# Altium PCB PCB_Test.PcbDoc
Units mm, origin at the board's own origin, x right, y up, seen from the top; angles counter-clockwise.
Board outline 152.4 x 101.6 mm, 2 copper layers (Top Layer, Bottom Layer); 14 components, 8 nets, 34 pads, 0 vias.
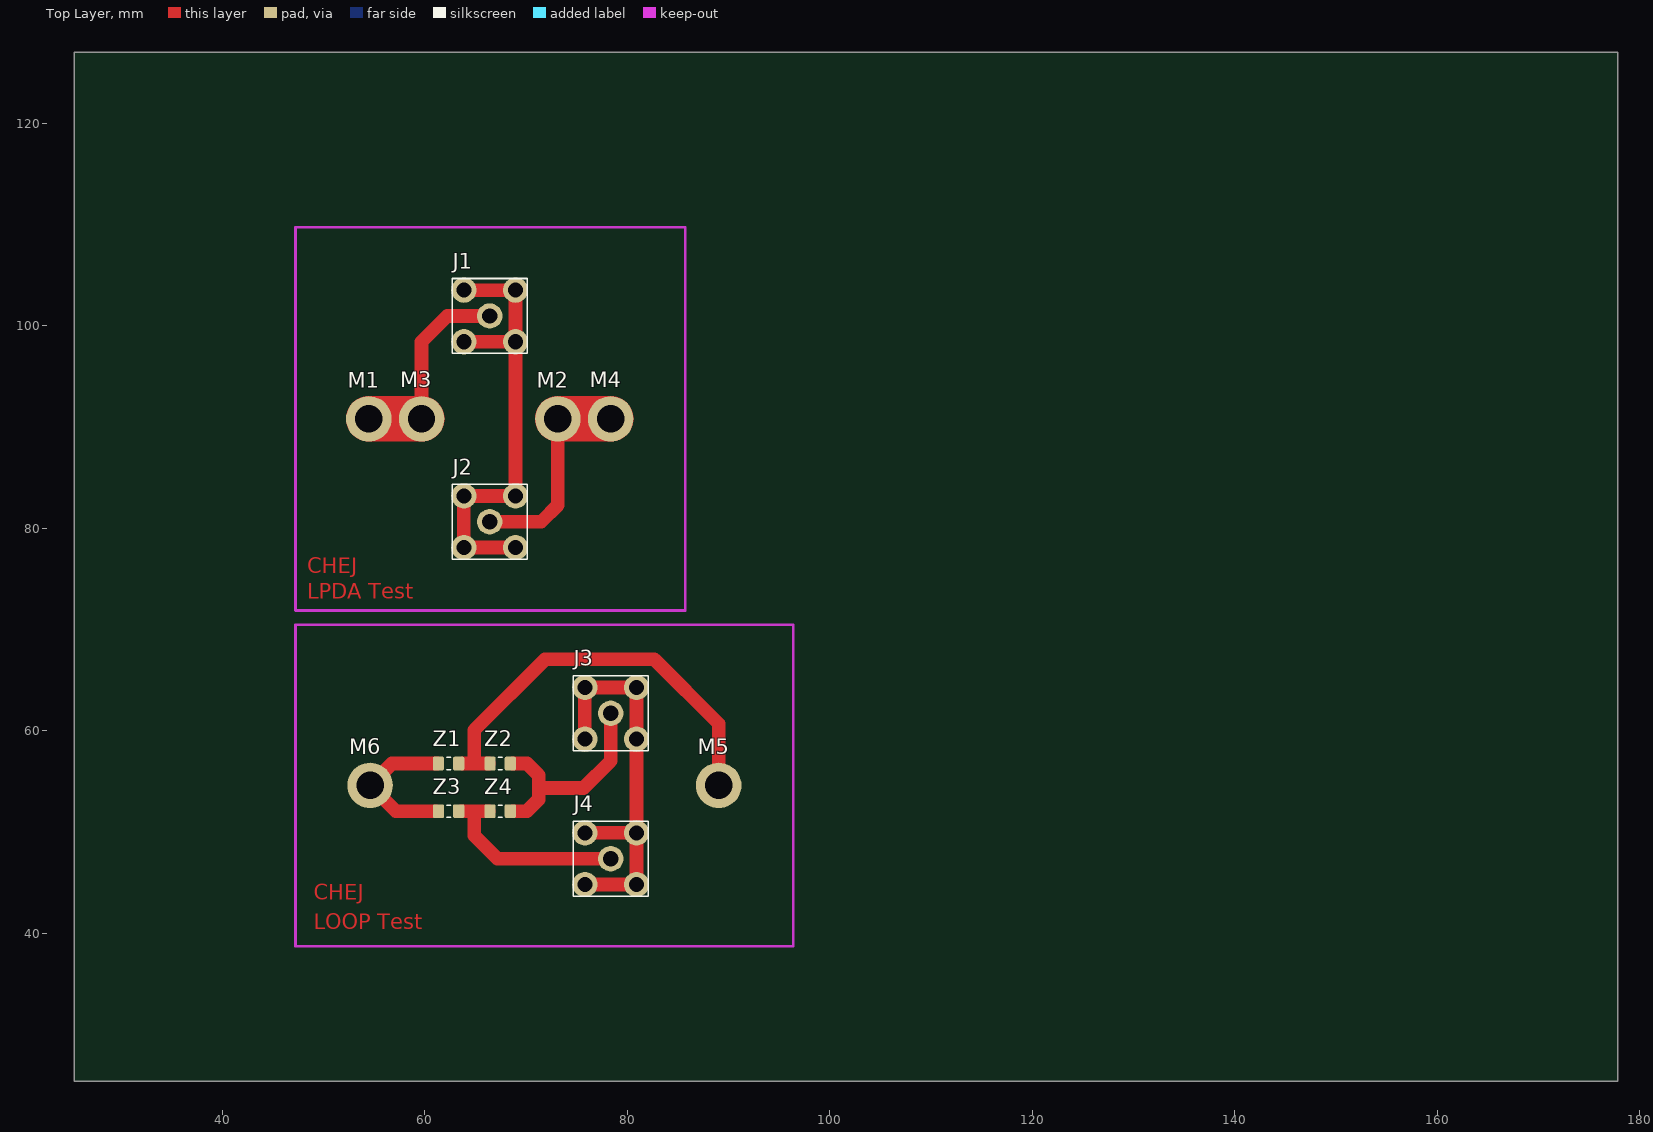
[diagram p0: Top Layer view]
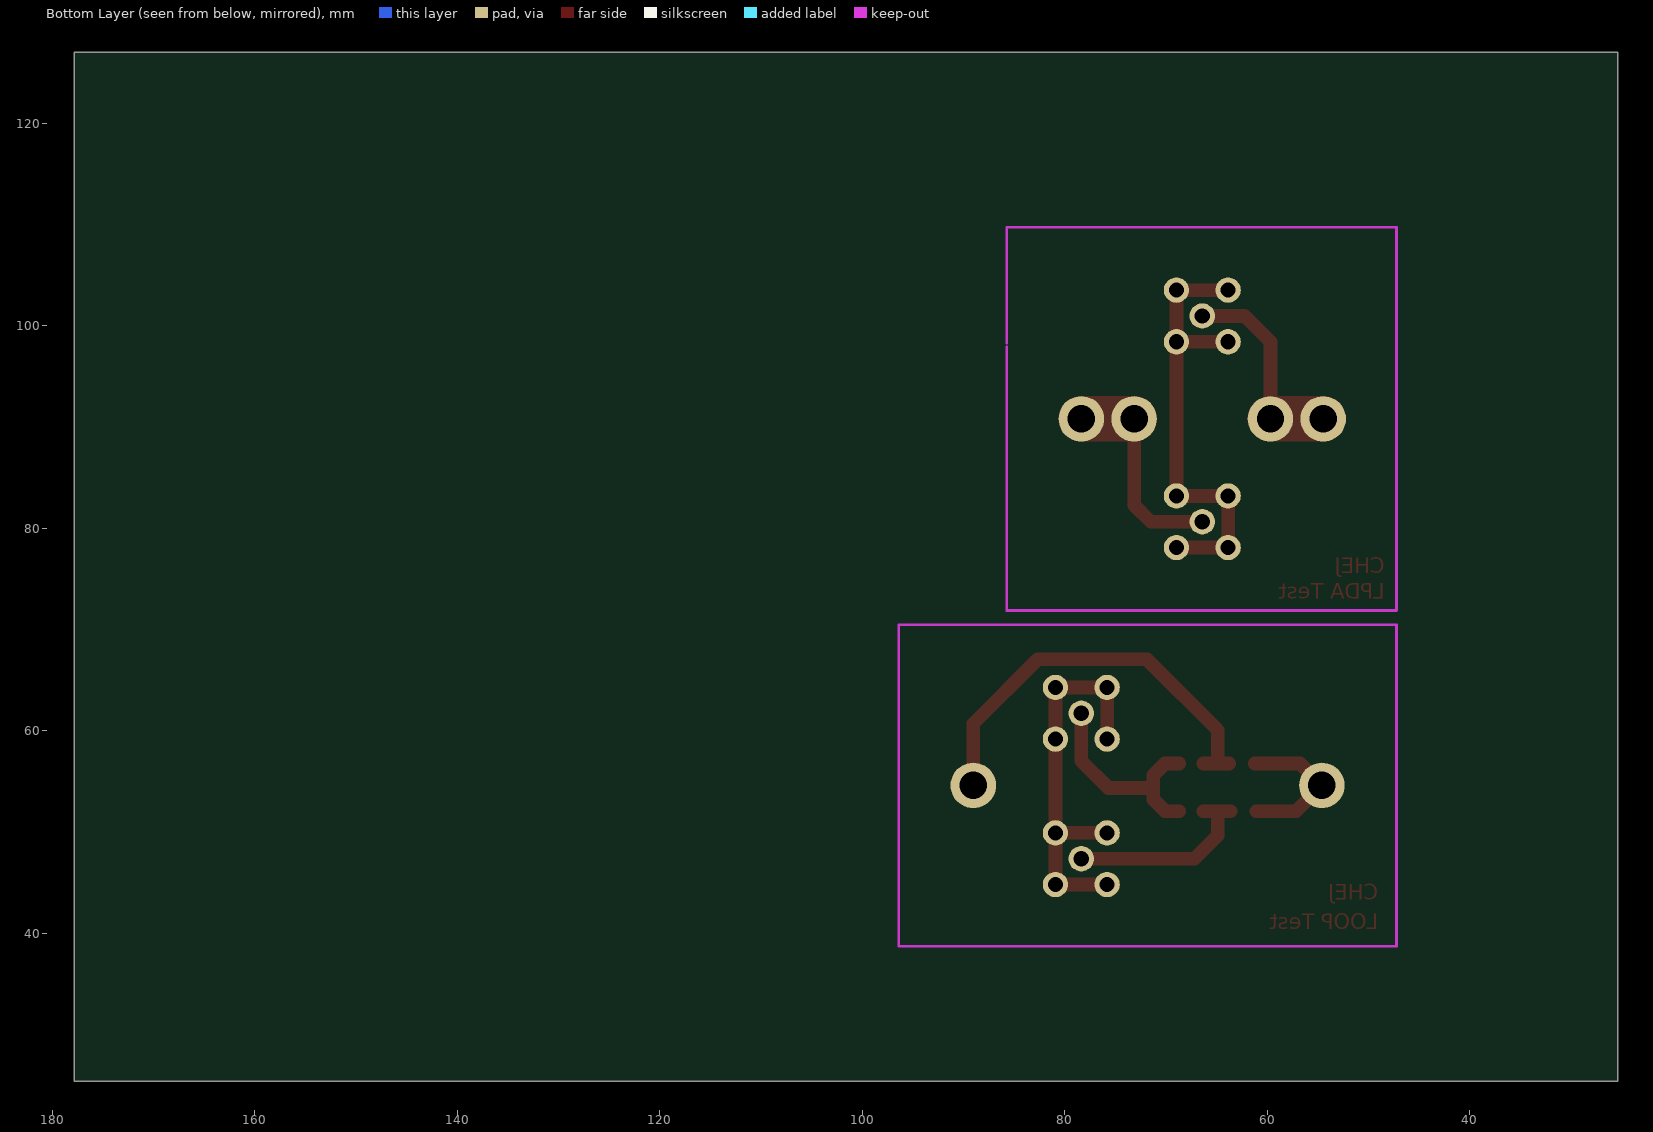
[diagram p1: Bottom Layer view, seen from below]
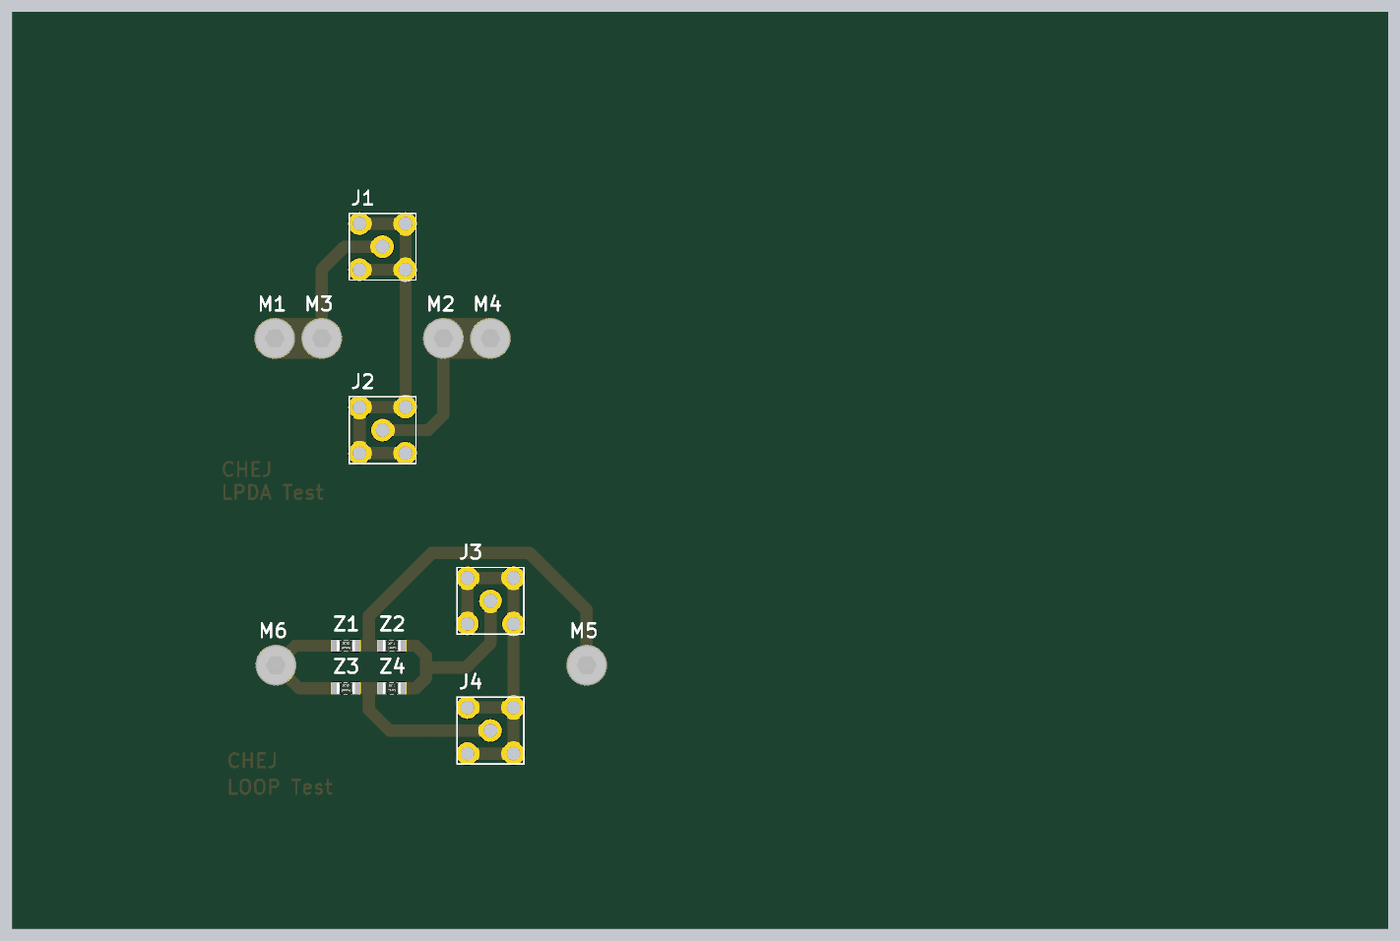
[diagram p2: 3D render of the assembled board from above, using the file's embedded part models]

## Layer stack, top to bottom
Top Solder: solder mask 0.0102, Solder Resist, Dk 3.5
Top Layer: signal copper 0.0356
Dielectric 1: dielectric 0.32, FR-4, Dk 4.8
Bottom Layer: signal copper 0.0356
Bottom Solder: solder mask 0.0102, Solder Resist, Dk 3.5

## Board outline
25.4,25.4 177.8,25.4 177.8,127 25.4,127

## Design rules (kind name [scope] priority, off if disabled: settings)
Clearance [All] p1: gap=0.254 ignorepadtopadclearanceinfootprint=FALSE except(0: Arc-Hole Track-Hole SMDPad-Hole THPad-Hole Via-Hole Fill-Hole Poly-Hole Region-Hole Text-Hole)
PolygonConnect [All] p1: connectstyle=Relief reliefconductorwidth=0.254 reliefentries=4 polygonreliefangle="90 Angle" airgapwidth=0.254
RoutingVias [All] p1: holewidth=0.711 width=1.27 viastyle="Through Hole" minholewidth=0.711 minwidth=1.27 maxholewidth=0.711 maxwidth=1.27
SolderMaskExpansion [All] p1: expansion=0.102
Width [All] p1 off: maxlimit=0.254 minlimit=0.254 preferedwidth=0.254
30 further rules are at their usual default settings.

## Components (designator, comment, footprint, x,y, rotation, side; value= is the part's Value field where it differs from the comment)
J1 "CONSMA001-G" "SMA TH Vertical Linx CONSMA001-G" 66.421,100.965 r0 top
J2 "CONSMA001-G" "SMA TH Vertical Linx CONSMA001-G" 66.421,80.645 r0 top
J3 "CONSMA001-G" "SMA TH Vertical Linx CONSMA001-G" 78.369,61.732 r0 top
J4 "CONSMA001-G" "SMA TH Vertical Linx CONSMA001-G" 78.369,47.371 r0 top
M1 "=Value" "Screw Hex Socket M2.5X4 Connected" 54.483,90.805 r0 top
M2 "=Value" "Screw Hex Socket M2.5X4 Connected" 73.152,90.805 r0 top
M3 "=Value" "Screw Hex Socket M2.5X4 Connected" 59.69,90.805 r0 top
M4 "=Value" "Screw Hex Socket M2.5X4 Connected" 78.359,90.805 r0 top
M5 "=Value" "Screw Hex Socket M2.5X4 Connected" 89.027,54.61 r0 top
M6 "=Value" "Screw Hex Socket M2.5X4 Connected" 54.61,54.61 r0 top
Z1 "*" "RESISTOR 2012 REFLOW" 62.357,56.769 r0 top
Z2 "*" "RESISTOR 2012 REFLOW" 67.453,56.769 r0 top
Z3 "*" "RESISTOR 2012 REFLOW" 62.357,52.07 r0 top
Z4 "*" "RESISTOR 2012 REFLOW" 67.453,52.07 r0 top

## Footprints (in the part's own frame and the unit in brackets; to place one, negate y for a bottom-side part, rotate by r counter-clockwise, add the part's x,y. Pads: shape width x height; smd on the part's side, far side on the other; paste and mask are expansions set on the pad)
"RESISTOR 2012 REFLOW" [mm] "Resistor SMD 2.0x1.2mm (0805-imperial)"
  rrect25% 1.1x1.35 smd: 1(-1,0) 2(1,0)
  silkscreen extent -0.2,-0.6 0.2,0.6, body extent -1,-0.62 1,0.63, height 0.45
"Screw Hex Socket M2.5X4 Connected" [mm] "Screw Hex Socket M2.5X4 Connected BN610"
  round 4.5 hole 2.7 paste-5 mask+0: 1(0,0)
  body extent -2.25,-2.25 2.25,2.25, height 2.5
"SMA TH Vertical Linx CONSMA001-G" [mm] "Connector SMA Trough Hole Vertical Linx nr. CONSMA001-G"
  round 2.5 hole 1.5: 1(0,0) 2(-2.55,-2.55) 2(-2.55,2.55) 2(2.55,-2.55) 2(2.55,2.55)
  silkscreen extent -3.7,-3.7 3.7,3.7, body extent -3.5,-3.5 3.5,3.5, height 10.25

## Part data
J1 J2 J3 J4: library part "SMA TH VERTICAL LINX CONSMA001-G", "SMA TH VERTICAL LINX CONSMA001-G"
M1 M2 M3 M4 M5 M6: library part "Screw Hex Socket Connected", "Screw Hex Socket Connected BN610"
Z1 Z2 Z3 Z4: library part Resistor, "Resistor"

## Nets (pads, with @x,y where several pads share a name; then routed paths per layer and width w, separated by ;. In a path a pad name is that pad's centre, name@x,y a point inside that pad or via, vN(x,y) a via of type N, cw(c..) or ccw(c..) an arc to the next point about the centre after c; other vN are vias at no path point)
NetJ1_1: J1.1 M1.1 M3.1 | length 20.6
  Top Layer w1.349: M3.1 59.69,98.425 62.23,100.965 J1.1
  Top Layer w4.5: M1.1 M3.1
NetJ1_2: J1.2 J2.2 | length 45.2
  Top Layer w1.349: J1.2@63.871,98.415 68.971,98.415 68.971,103.515 J1.2@63.871,103.515 ; J2.2@68.971,78.095 63.871,78.095 63.871,83.195 68.971,83.195 J1.2@68.971,97.78
NetJ2_1: J2.1 M2.1 M4.1 | length 21.1
  Top Layer w1.349: J2.1 71.501,80.645 73.152,82.296 M2.1
  Top Layer w4.5: M2.1 M4.1
NetJ3_1: J3.1 Z2.2 Z4.2 | length 21.4
  Top Layer w1.349: Z4.2@68.707,52.07 70.104,52.07 71.247,53.213 71.247,54.356 ; Z2.2@68.707,56.769 70.104,56.769 71.247,55.626 71.247,54.356 ; J3.1 78.369,57.033 75.692,54.356 71.247,54.356
NetJ3_2: J3.2 J4.2 | length 39.9
  Top Layer w1.349: J4.2@75.819,44.821 80.919,44.821 J4.2@80.919,49.921 ; J4.2@75.819,49.921 J4.2@80.919,49.921 ; J3.2@75.819,59.182 75.819,64.282 80.919,64.282 80.919,59.182 J4.2@80.919,49.921
NetJ4_1: J4.1 Z3.2 Z4.1 | length 19.5
  Top Layer w1.349: Z3.2@63.627,52.07 64.897,52.07 ; Z4.1@66.325,52.07 64.897,52.07 ; J4.1 67.183,47.371 64.897,49.657 64.897,52.07
NetM5_1: M5.1 Z1.2 Z2.1 | length 41.6
  Top Layer w1.349: Z1.2@63.754,56.769 64.897,56.769 ; Z2.1@66.294,56.769 64.897,56.769 ; M5.1 89.027,60.706 82.677,67.056 71.882,67.056 64.897,60.071 64.897,56.769
NetM6_1: M6.1 Z1.1 Z3.1 | length 15
  Top Layer w1.349: Z3.1@61.087,52.07 57.15,52.07 M6.1 56.769,56.769 Z1.1@61.214,56.769

## Keep-outs
Top Layer:
  lines w0.254: 85.725,97.917 85.725,98.298
Keep-Out Layer:
  lines w0.254: 85.725,97.917 85.725,83.439 85.725,71.882 47.244,71.882 47.244,83.439 47.244,90.805 47.244,98.298 47.244,109.728 85.725,109.728 85.725,98.298 ; 47.244,38.735 96.393,38.735 96.393,70.485 47.244,70.485 47.244,54.61 47.244,38.735

## Other copper
Top Layer:
  text "CHEJ" at 48.387,75.565 h1.52
  text "LPDA Test" at 48.387,73.025 h1.52
  text "CHEJ" at 49.022,43.307 h1.52
  text "LOOP Test" at 49.022,40.386 h1.52

## Silkscreen, mask and mechanical layers (free items; w line width, h text height)
Mechanical 1:
  lines w0.254: 47.244,54.61 52.324,54.61 ; 47.244,90.805 52.197,90.805 ; 66.294,71.882 66.294,76.962 ; 66.548,104.648 66.548,109.728 ; 78.359,38.735 78.359,43.688 ; 78.369,65.405 78.369,70.485 ; 80.645,90.932 85.725,90.932 ; 91.313,54.737 96.393,54.737
Drill Drawing:
  circle w0.254: c98.984,104.33 r0.843
  lines w0.254: 98.142,99.695 99.827,99.695 99.827,101.38 98.142,101.38 98.142,99.695
  lines w0.381: 96.63,98.557 154.417,98.557 ; 96.63,106.142 154.417,106.142 ; 110.56,94.765 110.56,109.934 ; 124.211,94.765 124.211,109.934 ; 96.63,94.765 154.417,94.765 154.417,109.934 96.63,109.934 96.63,94.765
  text "Symbol" at 98.905,107.279 h1.82
  text "Count" at 111.698,107.279 h1.82
  text "Hole Size" at 125.349,107.279 h1.82
  text "20" at 111.698,103.487 h1.52
  text "59.06mil (1.500mm)" at 125.349,103.487 h1.52
  text "6" at 111.698,99.695 h1.52
  text "106.30mil (2.700mm)" at 125.349,99.695 h1.52
  text "26 Total" at 111.698,95.903 h1.52